# Altium PCB Libaas_system.PcbDoc
Units mm, origin at the board's own origin, x right, y up, seen from the top; angles counter-clockwise.
Board outline 119.25 x 127.51 mm, 2 copper layers (Top Layer, Bottom Layer); 59 components, 50 nets, 249 pads, 16 vias.
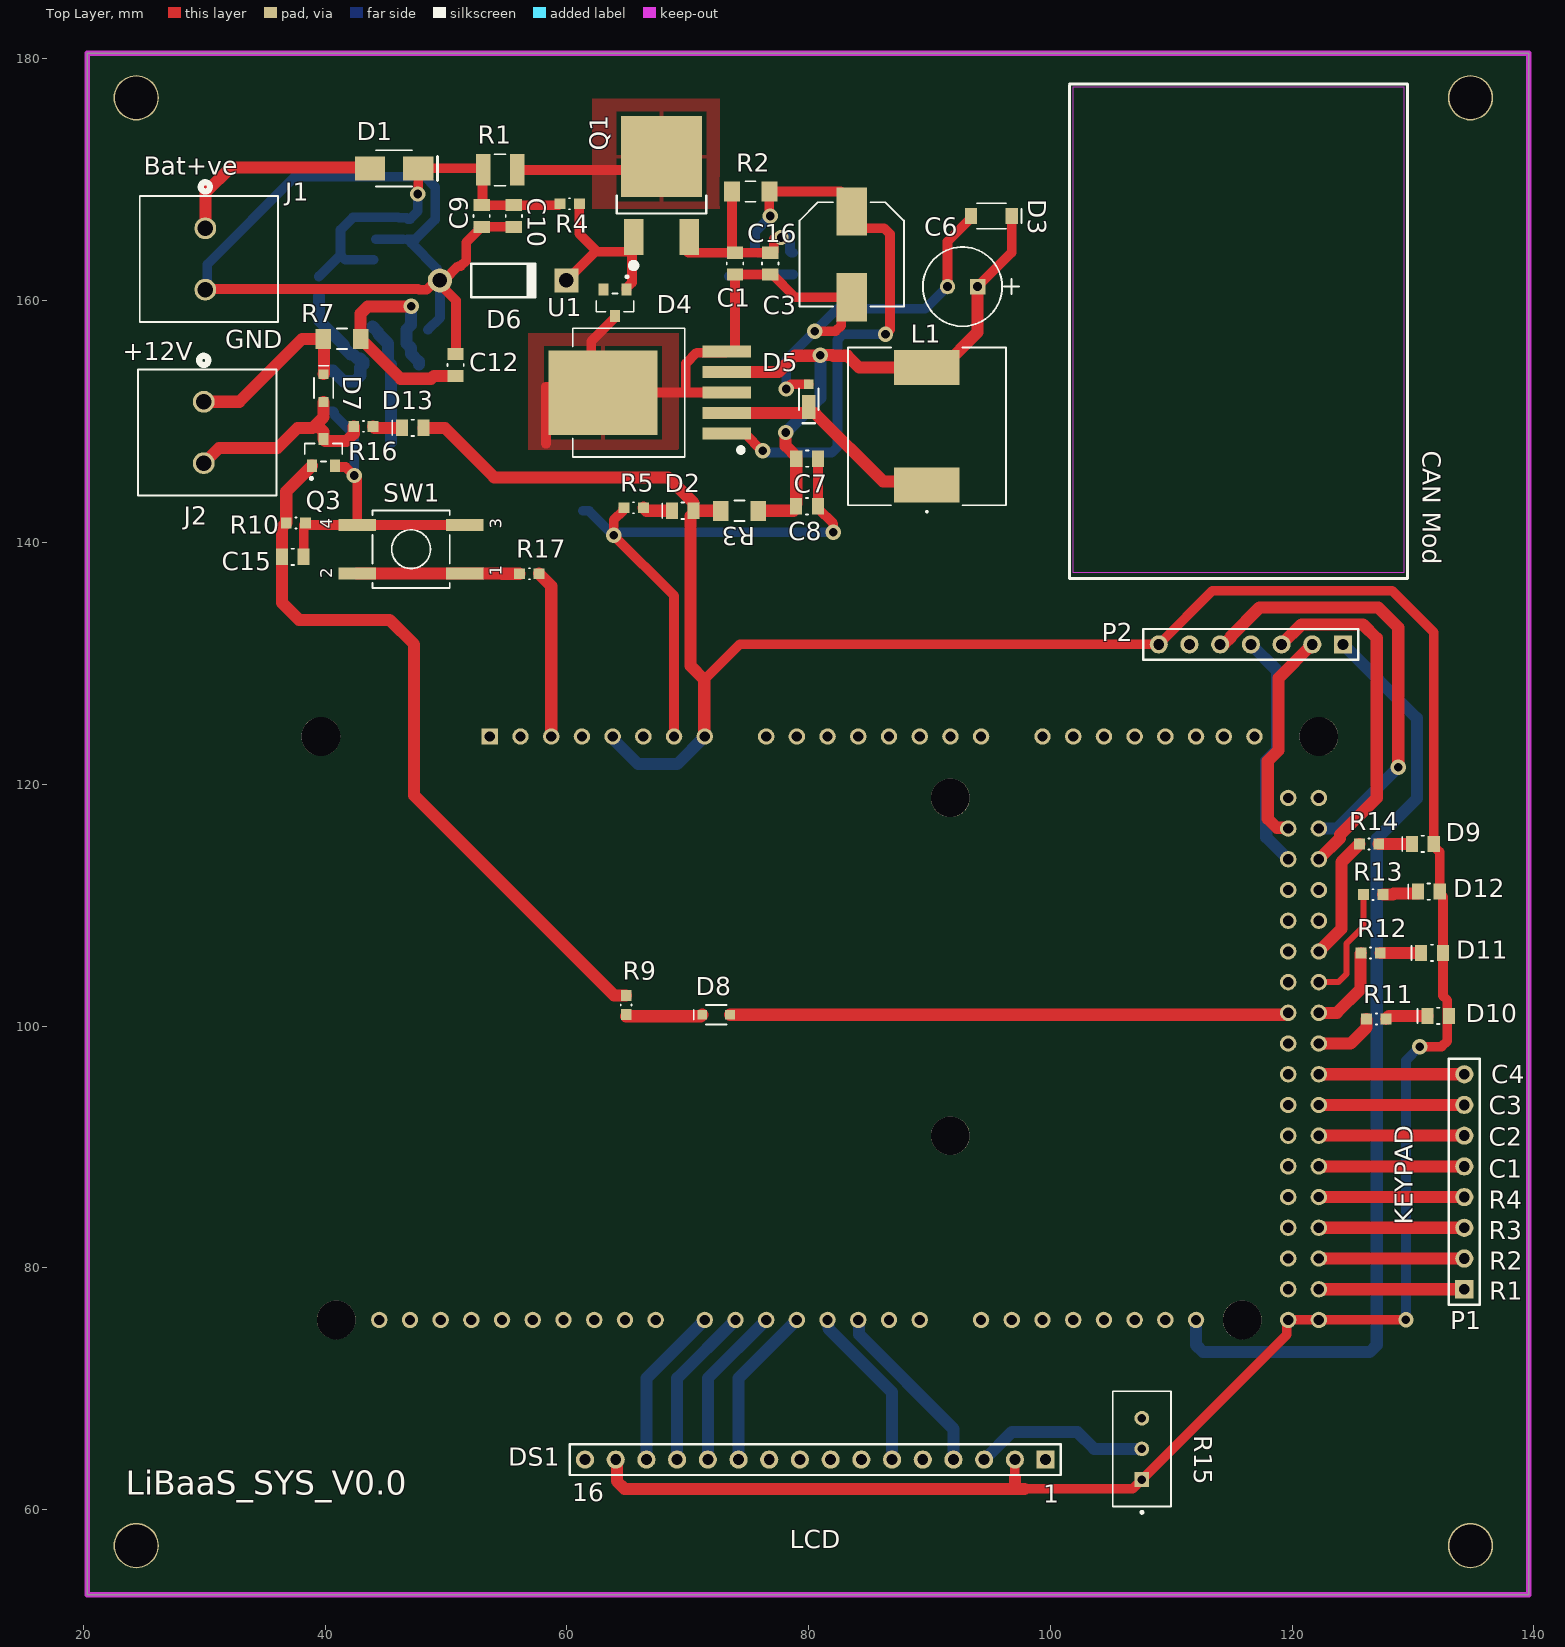
[diagram p0: Top Layer view]
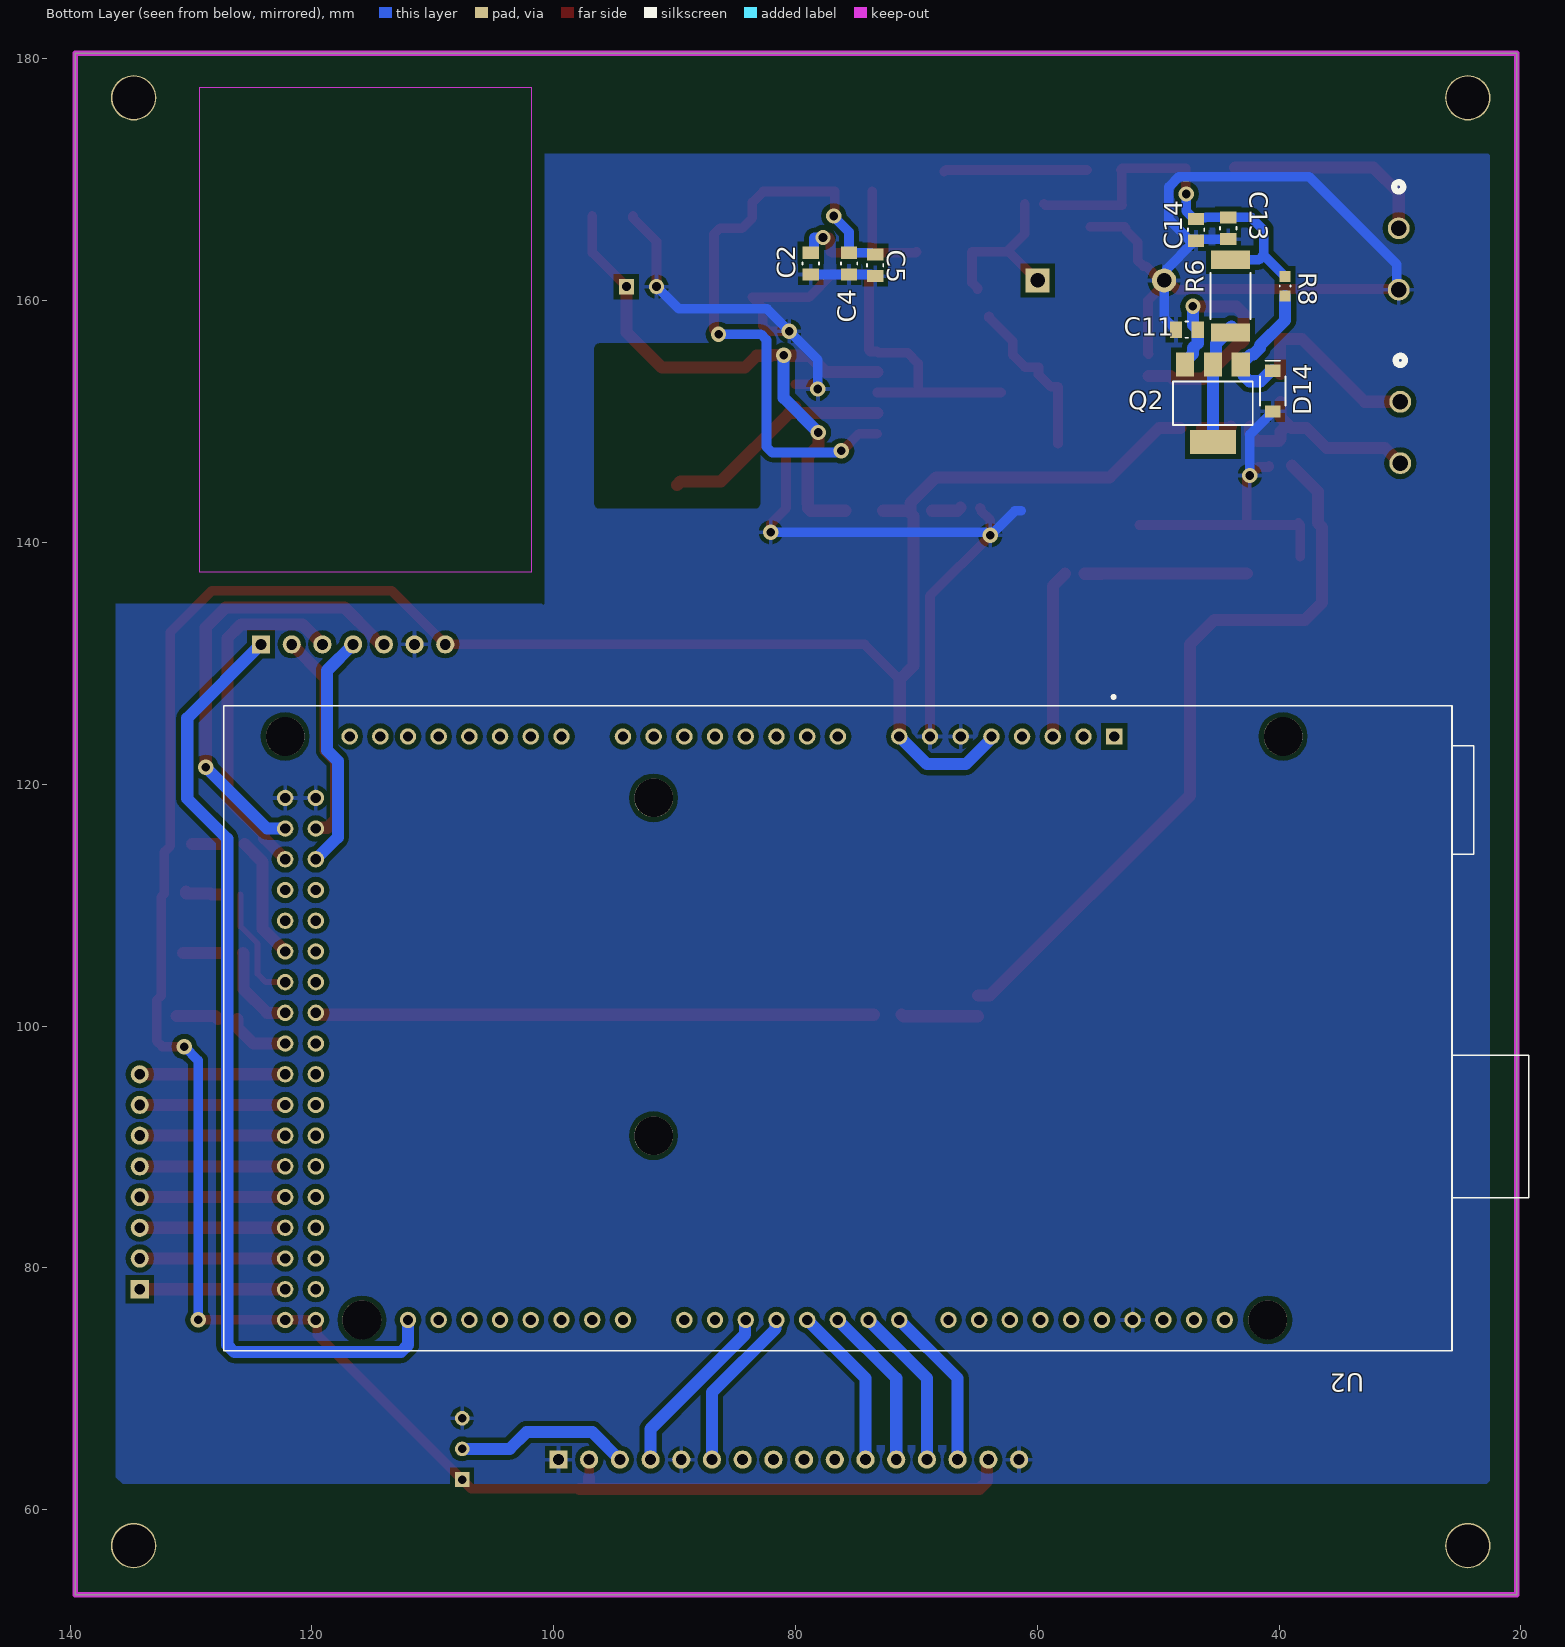
[diagram p1: Bottom Layer view, seen from below]
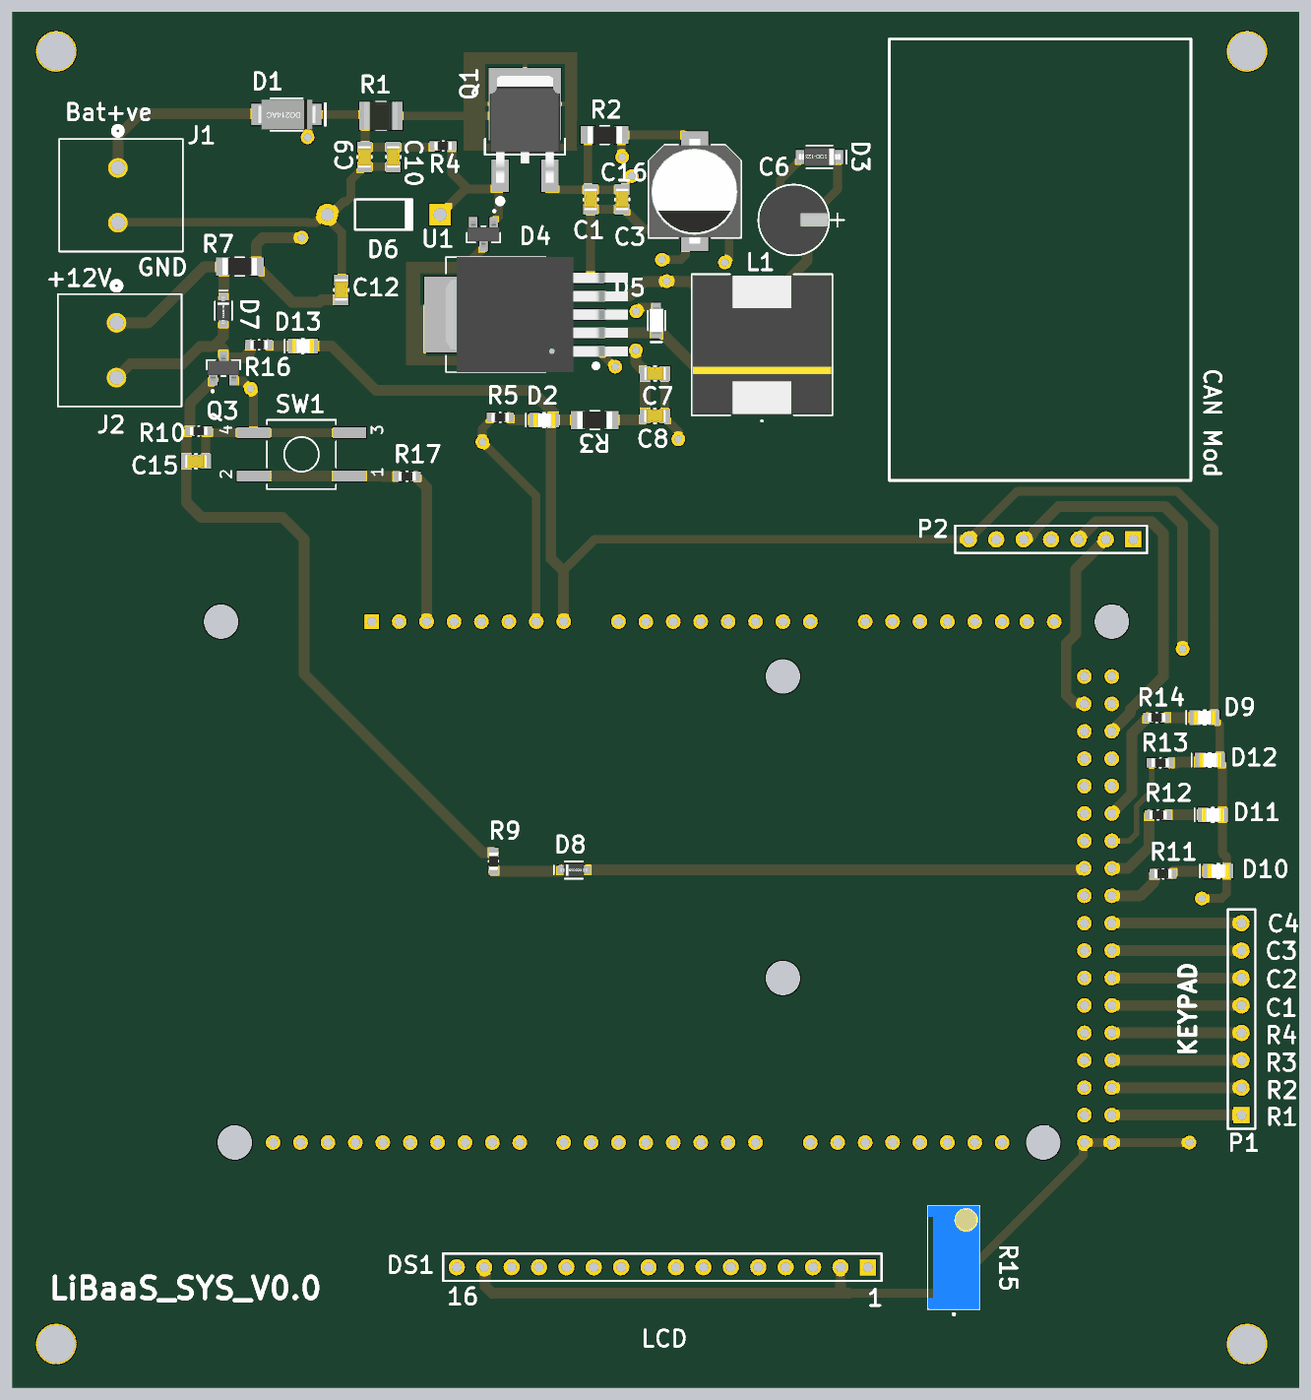
[diagram p2: 3D render of the assembled board from above, using the file's embedded part models]
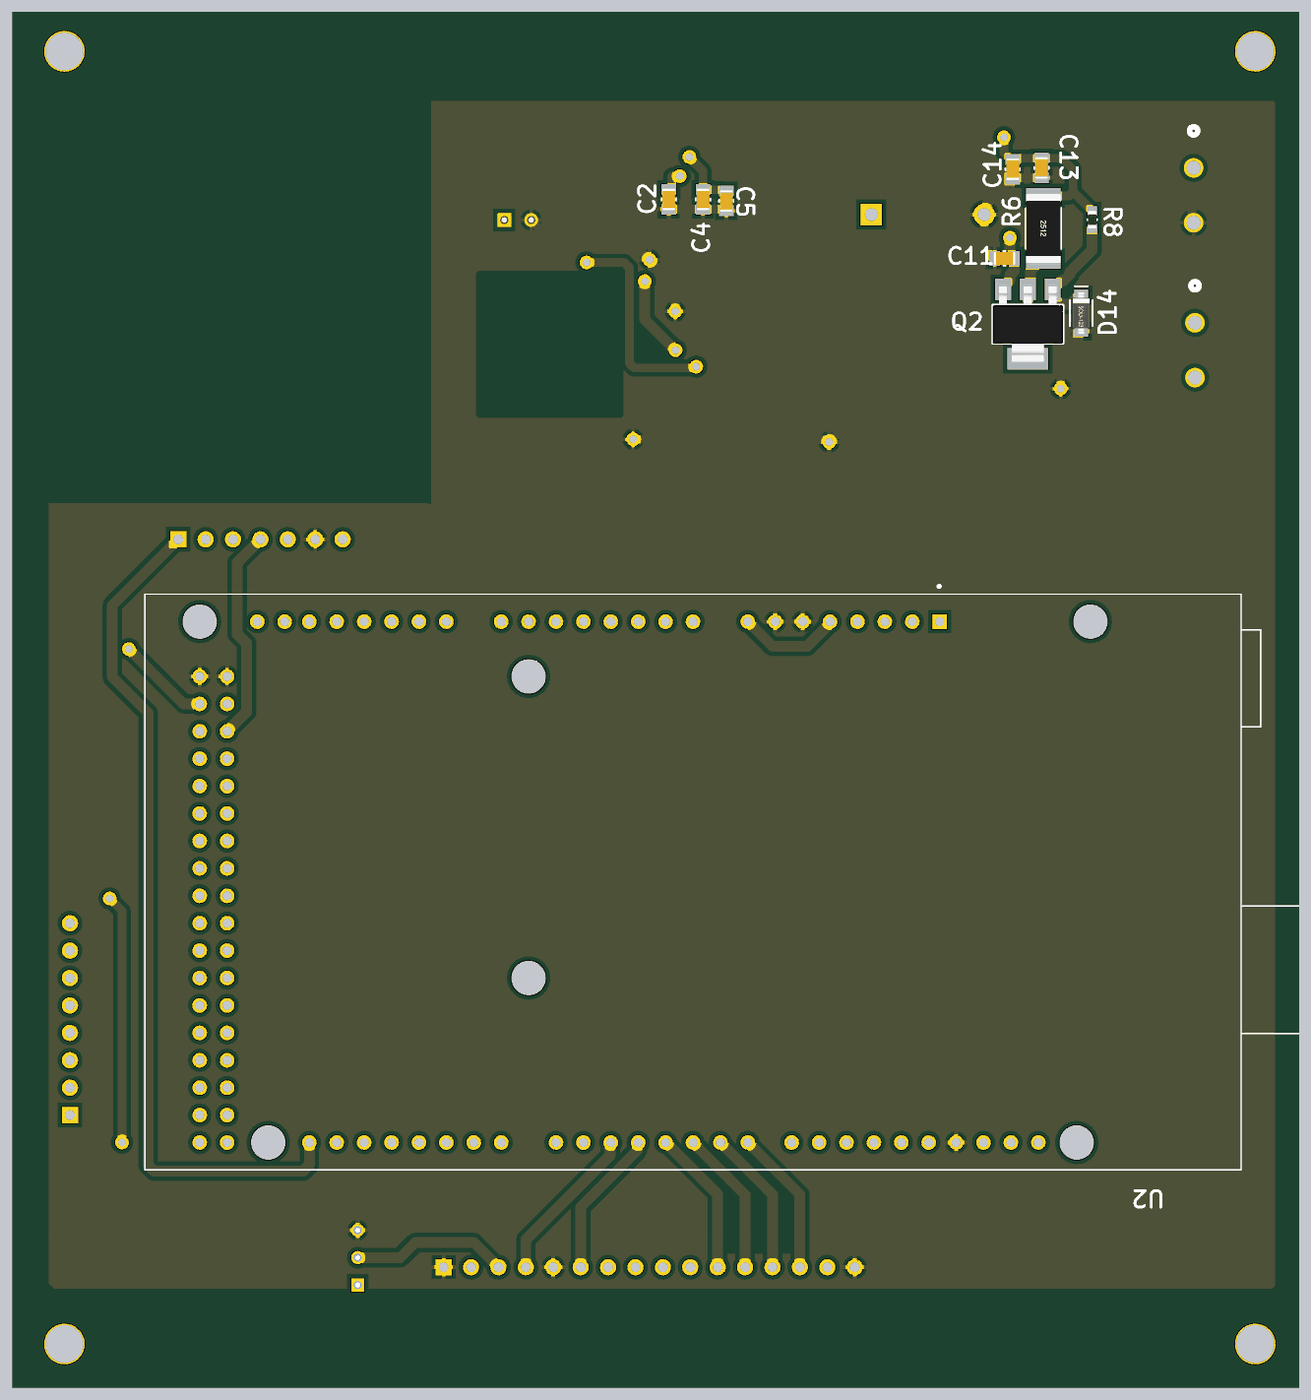
[diagram p3: 3D render of the assembled board from below, using the file's embedded part models]

## Layer stack, top to bottom
Top Solder: solder mask 0.0102, Solder Resist, Dk 3.5
Top Layer: signal copper 0.0356
Dielectric 1: dielectric 0.32, FR-4, Dk 4.8
Bottom Layer: signal copper 0.0356
Bottom Solder: solder mask 0.0102, Solder Resist, Dk 3.5

## Board outline
20.32,52.959 139.573,52.959 139.573,180.467 20.32,180.467

## Design rules (kind name [scope] priority, off if disabled: settings)
Clearance [All] p1: gap=0.4 ignorepadtopadclearanceinfootprint=FALSE
HoleSize [All] p1: absolutevalues=TRUE maxlimit=5 minlimit=0.025 maxpercent=80.000 minpercent=20.000
MinimumSolderMaskSliver [All] p1: minsoldermaskwidth=0.2
PlaneClearance [All] p1: clearance=0.6
PlaneConnect [All] p1: planeconnectstyle=Direct reliefexpansion=0.508 reliefentries=4 reliefconductorwidth=0.254 reliefairgap=0.254
PolygonConnect [All] p1: connectstyle=Relief reliefconductorwidth=0.35 reliefentries=4 polygonreliefangle="90 Angle" airgapwidth=0.35
RoutingVias [All] p1: holewidth=0.711 width=1.27 viastyle="Through Hole" minholewidth=0.711 minwidth=1.27 maxholewidth=0.711 maxwidth=1.27
SilkToSilkClearance [All] p1: silktosilkclearance=0.2
SilkToSolderMaskClearance [IsPad] p1: minsilkscreentomaskgap=0.01 clearancetoexposedcopper=TRUE
SolderMaskExpansion [All] p1: expansion=0.102 istentingtop=FALSE
Width [All] p1: maxlimit=1 minlimit=0.3 preferedwidth=0.5
24 further rules are at their usual default settings.

## Components (designator, comment, footprint, x,y, rotation, side; value= is the part's Value field where it differs from the comment)
C1 "1uF" CAP0805 73.914,163.068 r270 top
C2 "0.1uF" CAP0805 78.74,163.068 r270 bottom
C3 "22uF" CAPAE-D8_H1050 83.566,163.83 r270 top
C4 "0.1uF" CAP0805 75.565,163.068 r270 bottom
C5 "0.1uF" CAP0805 73.406,162.93 r270 bottom
C6 "470uF" UVZ1A471MED 93.98,161.163 r180 top
C7 "0.1uF" CAP0805 79.883,146.939 r0 top
C8 "0.1uF" CAP0805 79.872,143.002 r0 top
C9 "0.1uF" CAP0805 52.959,167.005 r270 top
C10 "1uF" CAP0805 55.626,167.005 r270 top
C11 "1uF" CAP0805 47.625,157.605 r0 bottom
C12 "0.1uF" CAP0805 50.8,154.686 r90 top
C13 "0.1uF" CAP0805 44.196,165.989 r270 bottom
C14 "1uF" CAP0805 46.863,165.862 r270 bottom
C15 "0.1uF" CAP0805 37.338,138.811 r0 top
C16 "1uF" CAP0805 76.835,163.068 r270 top
D1 "DIODE_CA" DO-214AC 45.72,170.942 r180 top
D2 "LED" LED0805 69.596,142.621 r0 top
D3 "MMSZ5236B-7-F" SOD-123 95.123,167.005 r180 top
D4 "ZENER_A_C" SOT-23#1 63.985,159.835 r180 top
D5 "SCHOTTKY_CA" DO-219AD 80.01,152.146 r90 top
D6 "Diode 1N4007" DO-41 54.737,161.671 r0 top
D7 "DIODE_CA" SOD-323 39.878,152.774 r270 top
D8 "DIODE_CA" SOD-323 72.354,100.936 r0 top
D9 "LED" LED0805 130.81,115.062 r0 top
D10 "LED" LED0805 132.08,100.838 r0 top
D11 "LED" LED0805 131.572,106.045 r0 top
D12 "LED" LED0805 131.307,111.125 r0 top
D13 "LED" LED0805 47.255,149.479 r0 top
D14 "MMSZ5245B-7-F" SOD-123 40.513,152.527 r270 bottom
DS1 "LCD_20X4" HDR1X16 99.606,64.135 r180 top
J1 "1711725" 1711725 30.099,165.989 r270 top
J2 "1711725" 1711725 29.972,151.638 r270 top
L1 "IND" SRR1280-102K 89.789,149.606 r90 top value=1000uH
P1 "Header 8" HDR1X8 134.239,78.232 r90 top
P2 "Header 7" HDR1X7 124.206,131.572 r180 top
Q1 "NPN_BCE" TO-252 67.828,168.588 r0 top
Q2 "FZT649TA" SOT-223 45.466,151.511 r0 bottom
Q3 "NMOS_GSD" SOT-23#2 39.878,147.447 r0 top
R1 "10" RES1210 54.483,170.815 r0 top
R2 "0" RES1206 75.21,169.037 r0 top
R3 "0" RES1206 74.295,142.621 r180 top
R4 "4.7k" RES0603 60.236,168.021 r0 top
R5 "182" RES0603 65.532,142.875 r180 top
R6 "10" RES2512 44.02,160.382 r270 bottom
R7 "0" RES1206 41.402,156.845 r180 top
R8 "4.7k" RES0603 39.494,161.2 r270 bottom
R9 "2.2k" RES0603 64.914,101.742 r270 top
R10 "47K" RES0603 37.592,141.605 r180 top
R11 "182" RES0603 126.962,100.584 r180 top
R12 "182" RES0603 126.492,106.045 r180 top
R13 "182" RES0603 126.708,110.871 r180 top
R14 "182" RES0603 126.365,115.062 r180 top
R15 "Trim_pot_3296" Trim_pot_3296 107.569,65.024 r90 top
R16 "182" RES0603 43.18,149.606 r180 top
R17 "182" RES0603 56.896,137.414 r0 top
SW1 "KSC2-SPST-NO" KSC2XXG 47.117,139.446 r180 top
U1 "LM2596-5.0" LM2576-5.0 66.902,152.4 r90 top
U2 "Arduino Mega" "Arduino Mega" 76.492,99.822 r270 bottom

## Footprints (in the part's own frame and the unit in brackets; to place one, negate y for a bottom-side part, rotate by r counter-clockwise, add the part's x,y. Pads: shape width x height; smd on the part's side, far side on the other; paste and mask are expansions set on the pad)
1711725 [mil]
  round 71 hole 51 mask+0: 1(0,0) 2(200,0)
  silkscreen extent -150,-214 305,237, body extent 0,0 10,10, height 10
"Arduino Mega" [mm]
  round 1.358 hole 0.85: 0(24.13,-12.7) 1(24.13,-10.16) 2(24.13,-7.62) 3(24.13,-5.08) 3V3(-24.13,15.24) 4(24.13,-2.54) 5(24.13,0) 5V_1(-24.13,12.7) 5V_2(24.13,-43.18) 5V_3(24.13,-45.72) 6(24.13,2.54) 7(24.13,5.08) 8(24.13,9.144) 9(24.13,11.684) 10(24.13,14.224) 11(24.13,16.764) 12(24.13,19.304) 13(24.13,21.844) 14(24.13,-17.78) 15(24.13,-20.32) 16(24.13,-22.86) 17(24.13,-25.4) 18(24.13,-27.94) 19(24.13,-30.48) 20(24.13,-33.02) 21(24.13,-35.56) 22(21.59,-43.18) 23(21.59,-45.72) 24(19.05,-43.18) 25(19.05,-45.72) 26(16.51,-43.18) 27(16.51,-45.72) 28(13.97,-43.18) 29(13.97,-45.72) 30(11.43,-43.18) 31(11.43,-45.72) 32(8.89,-43.18) 33(8.89,-45.72) 34(6.35,-43.18) 35(6.35,-45.72) 36(3.81,-43.18) 37(3.81,-45.72) 38(1.27,-43.18) 39(1.27,-45.72) 40(-1.27,-43.18) 41(-1.27,-45.72) 42(-3.81,-43.18) 43(-3.81,-45.72) 44(-6.35,-43.18) 45(-6.35,-45.72) 46(-8.89,-43.18) 47(-8.89,-45.72) 48(-11.43,-43.18) 49(-11.43,-45.72) 50(-13.97,-43.18) 51(-13.97,-45.72) 52(-16.51,-43.18) 53(-16.51,-45.72) AD0(-24.13,0) AD1(-24.13,-2.54) AD2(-24.13,-5.08) AD3(-24.13,-7.62) AD4(-24.13,-10.16) AD5(-24.13,-12.7) AD6(-24.13,-15.24) AD7(-24.13,-17.78) AD8(-24.13,-22.86) AD9(-24.13,-25.4) AD10(-24.13,-27.94) AD11(-24.13,-30.48) AD12(-24.13,-33.02) AD13(-24.13,-35.56) AD14(-24.13,-37.846) AD15(-24.13,-40.386) AREF(24.13,26.924) GND1(-24.13,10.16) GND2(-24.13,7.62) GND3(24.13,24.384) GND4(-19.05,-43.18) GND5(-19.05,-45.72) IOREF(-24.13,20.32) RESET(-24.13,17.78) SCL(24.13,32.004) SDA(24.13,29.464) VIN(-24.13,5.08)
  rect 1.358x1.358 hole 0.85: NC(-24.13,22.86)
  round 3.2 hole 3.2 unplated: ""(-24.13,-45.72) ""(-24.13,36.83) ""(-19.05,-15.24) ""(8.89,-15.24) ""(24.13,-39.37) ""(24.13,35.56)
  silkscreen extent -27.52,-50.8 26.67,57.15
CAP0805 [mm]
  rect 1x1.35 smd: 1(-0.9,0) 2(0.9,0)
  silkscreen extent -0.1,-0.67 0.1,0.67, body extent -1,-0.6 1,0.6, height 1.45
CAPAE-D8_H1050 [mm]
  rect 4x2.5 smd: 1(-3.55,0) 2(3.55,0)
  silkscreen extent -4.32,-4.32 4.32,4.32, body extent -4.85,-4.25 4.85,4.25, height 10.5
DO-41 [mm] "Diode, Axial; Body 5.2 x 2.7 mm (LxDia. max), Lead Dia. 0.86 mm (max)"
  round 2 hole 1.2: 1(-5.23,0)
  rect 2x2 hole 1.2: 2(5.23,0)
  silkscreen extent -2.65,-1.4 2.75,1.4
DO-214AC [mm]
  rect 2.5x2 smd: 1(-2,0) 2(2,0)
  silkscreen extent -3.6,-1.5 1.5,1.5, body extent -2.79,-1.4 2.7,1.4, height 2.29
DO-219AD [mm]
  rect 2x1.1 smd: 1(-0.95,0)
  rect 0.8x0.8 smd: 2(0.95,0)
  silkscreen extent -2.3,-0.8 0.6,0.8, body extent -1.55,-0.65 0.95,0.65, height 0.67
HDR1X7 [mm] "Connector; Header; 7 Position"
  rect 1.5x1.5 hole 0.9: 1(0,0)
  round 1.5 hole 0.9: 2(2.54,0) 3(5.08,0) 4(7.62,0) 5(10.16,0) 6(12.7,0) 7(15.24,0)
  silkscreen extent -1.27,-1.27 16.51,1.27
HDR1X8 [mm] "Connector; Header; 8 Position"
  rect 1.5x1.5 hole 0.9: 1(0,0)
  round 1.5 hole 0.9: 2(2.54,0) 3(5.08,0) 4(7.62,0) 5(10.16,0) 6(12.7,0) 7(15.24,0) 8(17.78,0)
  silkscreen extent -1.27,-1.27 19.05,1.27
HDR1X16 [mm] "Connector; Header; 16 Position"
  rect 1.5x1.5 hole 0.9: 1(0,0)
  round 1.5 hole 0.9: 2(2.54,0) 3(5.08,0) 4(7.62,0) 5(10.16,0) 6(12.7,0) 7(15.24,0) 8(17.78,0) 9(20.32,0) 10(22.86,0) 11(25.4,0) 12(27.94,0) 13(30.48,0) 14(33.02,0) 15(35.56,0) 16(38.1,0)
  silkscreen extent -1.27,-1.27 39.37,1.27
KSC2XXG [mm] "SW tactile 6.2mm X 6.2mm 3.5mm Height"
  rect 3.1x1 smd: 1(-4.45,2) 2(4.45,2) 3(-4.45,-2) 4(4.45,-2)
  silkscreen extent -3.2,-3.2 3.2,3.2, body extent -3.1,-3.1 3.1,3.1, height 3.5
LED0805 [mm]
  rect 1x1.35 smd: 1(-0.9,0) 2(0.9,0)
  silkscreen extent -1.7,-0.67 0.1,0.67, body extent -0.99,-0.63 1.01,0.62, height 1.09
LM2576-5.0 [mm]
  rect 1x4 smd: 1(-3.4,-6.33) 2(-1.7,-6.33) 3(0,-6.33) 4(1.7,-6.33) 5(3.4,-6.33)
  rect 7x9 smd: 6(0,3.91)
  silkscreen extent -5.33,-7.7 5.33,6.4, body extent -5.33,-10.45 5.33,6.44, height 4.6
RES0603 [mm]
  rect 0.9x0.9 smd: 1(-0.8,0) 2(0.8,0)
  silkscreen extent -0.05,-0.45 0.05,0.45, body extent -0.8,-0.4 0.8,0.4, height 0.45
RES1206 [mm]
  rect 1.3x1.65 smd: 1(-1.55,0) 2(1.55,0)
  silkscreen extent -0.43,-0.85 0.43,0.85, body extent -1.6,-0.8 1.6,0.8, height 0.6
RES1210 [mm]
  rect 1.2x2.6 smd: 1(-1.4,0) 2(1.4,0)
  silkscreen extent -0.45,-1.3 0.45,1.3, body extent -1.55,-1.3 1.55,1.3, height 0.57
RES2512 [mm]
  rect 1.5x3.2 smd: 1(-3,0) 2(3,0)
  silkscreen extent -1.9,-1.65 1.9,1.65, body extent -3.2,-1.6 3.2,1.6, height 0.59
SOD-123 [mm]
  rect 1x1.3 smd: 1(-1.68,0) 2(1.68,0)
  silkscreen extent -2.5,-1.05 1.2,1.05, body extent -1.94,-0.86 1.91,0.84, height 1.42
SOD-323 [mm] "DIODE ZENER 15V 300MW SOD323"
  rect 0.8x0.8 smd: 1(-1.15,0) 2(1.15,0)
  silkscreen extent -1.85,-0.8 0.85,0.8, body extent -1.25,-0.63 1.25,0.62, height 0.98
SOT-23#1 [mm]
  rect 0.8x1 smd: 1(0,1.1) 2(0.95,-1.1) 3(-0.95,-1.1)
  silkscreen extent -1.55,-2.25 1.55,0.75, body extent -1.46,-1.25 1.46,1.23, height 1
SOT-23#2 [mm]
  rect 0.8x1 smd: 1(-0.95,-1.1) 2(0.95,-1.1) 3(0,1.1)
  silkscreen extent -1.55,-2.25 1.55,0.75, body extent -1.46,-1.25 1.46,1.23, height 1
SOT-223 [mm]
  rect 1.5x2 smd: 1(-2.3,-3.2) 2(0,-3.2) 3(2.3,-3.2)
  rect 3.8x2 smd: 4(0,3.2)
  silkscreen extent -3.3,-1.8 3.3,1.8, body extent -3.25,-3.48 3.25,3.48, height 1.65
SRR1280-102K [mil]
  rect 114x213 smd paste+0 mask+0: 1(-191,0) 2(191,0)
  silkscreen extent -281,-257 257,257, body extent -252,-252 252,252, height 315
TO-252 [mm] "DPAK"
  rect 1.6x3 smd: 1(-2.3,-3.325) 3(2.3,-3.325)
  rect 6.7x6.7 smd: 2(0,3.325)
  silkscreen extent -3.7,-5.9 3.7,0.1, body extent -3.27,-3.99 3.27,5.95, height 2.39
Trim_pot_3296 [mm]
  rect 1.218x1.218 hole 0.71: 1(-2.54,0)
  round 1.218 hole 0.71: 2(0,0) 3(2.54,0)
  silkscreen extent -5.35,-2.41 4.76,2.42, body extent -4.76,-2.42 4.76,2.41, height 11.55
UVZ1A471MED [mil]
  rect 50x50 hole 30 mask+0: 1(0,0)
  round 50 hole 30 mask+0: 2(98,0)
  silkscreen extent -135,-129 178,129, body extent -75,-124 173,124, height 424

## Part data
C1 C10 C11 C14 C16: library part C0805C105K3RACAUTO, "CAP CER 1uF 25V 10% X7R 0805", Manufacturer=Kemet, TempCoef=X7R, Tolerance=10%, Voltage=25V, Alt MFG 1=TDK, Alt MFG 2="Taiyo Yuden", Alt P/N 1=CGA6M2X7R2A105K200AA, Alt P/N 2=HMK325B7105KNHT, Automotive Grade=AEC-Q200, Height=1.45mm, Mounting Type=SMD, Part Number=C0805C105K3RACAUTO, VoltageRating=25V
C2 C7 C8 C9 C12 C13 C15: library part C0805C104J5RACAUTO, "CAP CER 0.1uF 50V 5% X7R 0805", Manufacturer=Kemet, TempCoef=X7R, Tolerance=5%, Voltage=50V, Alt MFG 1=TDK, Alt P/N 1=CGA3E3NP02E821J080AA, Automotive Grade=AEC-Q200, Height=1.45mm, Mounting Type=SMD, Part Number=C0805C104J5RACAUTO, VoltageRating=50V
C3: library part EEE-TG1J220P, "CAP ALUM 22uF 63V 20% SMD", Manufacturer=Panasonic, Tolerance=20%, Voltage=63V, Automotive Grade=AEC-Q200, Height=10.5mm, Mounting Type=SMD, Part Number=EEE-TG1J220P, VoltageRating=63V
C4 C5: library part C0805C104K1RACAUTO, "CAP CER 0.1uF 100V 10% X7R 0805", Manufacturer=Kemet, TempCoef=X7R, Tolerance=10%, Voltage=100V, Alt MFG 1=Murata, Alt P/N 1=GCM1885C1H680FA16D, Automotive Grade=AEC-Q200, Height=1.45mm, Mounting Type=SMD, Part Number=C0805C104K1RACAUTO, VoltageRating=100V
C6: library part UVZ1A471MED, "Aluminium Electrolytic Capacitors - Radial Leaded 470uF 10 Volts 20%", Manufacturer=Nichicon, Tolerance=20%, Voltage=10V, Height=11mm, Mounting Type=TH, Part Number=UVZ1A471MED, VoltageRating=10V
D1: library part S1M, "DIODE GEN 1000V 1A DO214AC", Current at Vf (A)=1A, DC Reverse Voltage  (V, Max)=1000V, Forward Voltage (V)=1V, Manufacturer=Vishay, Power (W)=1W, Automotive Grade=AEC-Q101, Height=1.4W, Mounting Type=SMD, Part Number=S1M, Type=Standard
D2 D9 D10 D11 D12 D13: library part LTST-C171CKT, "LED RED CLEAR 0805", Color=RED, Current=20mA, Manufacturer=Lite-On, Voltage - Forward (Vf)=1.8V, Automotive Grade=N/A, Height=0.8mm, Mounting Type=SMD, Part Number=LTST-C171CKT
D3: "Zener Diodes 7.5V 500mW SOD123", Current at Vf (A)=20mA, DC Reverse Voltage  (V, Max)=7.5V, Forward Voltage (V)=900mV, Manufacturer=Diodes, Power (W)=500mW, Automotive Grade=AEC-Q101, Height=1.35mm, Mounting Type=SMD, Part Number=MMSZ5236B-7-F, Type=Zener
D4: library part BZX84C36-7, "Zener Diode 36V 225mW Â±6% Surface Mount SOT-23-3 (TO-236)", Current at Vf (A)=10mA, DC Reverse Voltage  (V, Max)=36V, Forward Voltage (V)=900mV, Manufacturer=Diodes, Power (W)=500mW, Height=1.35mm, Mounting Type=SMD, Part Number=BZX84C36-7, Type=Zener
D5: library part B140HW-7-F, "1.0A SURFACE MOUNT SCHOTTKY BARRIER RECTIFIER", Current at Vf (A)=1A, DC Reverse Voltage  (V, Max)=40V, Forward Voltage (V)=500mV, Manufacturer=Diodes, Power (W)=350mW, Height=1.35mm, Mounting Type=SMD, Part Number=B140HW-7-F, Type=Schottky
D6: "1 Amp General Purpose Rectifier", Code_JEDEC=DO-204-AL, ComponentLink1Description="Manufacturer Link", ComponentLink1URL=http://www.fairchildsemi.com/, ComponentLink2Description=Datasheet, ComponentLink2URL=http://www.fairchildsemi.com/ds/1N%2F1N4001.pdf, DatasheetVersion=1998, LatestRevisionDate=17-Jul-2002, LatestRevisionNote="Re-released for DXP Platform.", PackageDescription="Diode, Axial; Body 5.2 x 2.7 mm (LxDia. max), Lead Dia. 0.86 mm (max)", PackageReference=DO-41, PackageVersion=Aug-1999, Published=8-Jun-2000, Publisher="Altium Limited"
D7 D8: library part 1N4148WSQ-7-F, "DIODE GEN 75V 150mA SOD-323", Current at Vf (A)=150mA, DC Reverse Voltage  (V, Max)=75V, Forward Voltage (V)=1.25V, Manufacturer=Diodes, Power (W)=200mW, Automotive Grade=AEC-Q101, Height=1.2mm, Mounting Type=SMD, Part Number=1N4148WSQ-7-F, Type=General
D14: "Zener Diodes 15V 500mW SOD123", Current at Vf (A)=10mA, DC Reverse Voltage  (V, Max)=15V, Forward Voltage (V)=500mV, Manufacturer=Diodes, Power (W)=500mW, Height=1.35mm, Mounting Type=SMD, Part Number=MMSZ5245B-7-F, Type=Zener
DS1: "20 x 4 LCD", Manufacturer=local, Package=None, Availability=Unavailable, Component Type=Standard, MF=Gravitech, Mouser-Purchase-URL=https://snapeda.com/shop?store=Mouser&id=833821, MP=LCD-20X4B, Part Number=LCD_20X4, Price=None, SnapEDA_Link=https://www.snapeda.com/parts/LCD-20X4B/Gravitech/view-part/833821/?ref=snap
J1 J2: "PHOENIX CONNECTOR 5.08mm PITCH", Manufacturer=PHOENIX, article_description="MKDS 3/ 2-5,08", Built_By=EMA_Matt, contact_type=Unknown, Copyright="Copyright (C) 2018 Accelerated Designs. All rights reserved", Gender=Female, Manufacturer_Part_Number=1711725, Mounting Type=TH, No# of Positions=3, number_of_connection=2, Number_of_position_per_row=2, number_of_potentials=2, number_of_rows=1, number_of_solder_pins_per_potentials=1, Part Number=1711725, pitch_(mm)=5.08, Plug_system=Unknown, Product_family="MKDS 3", Producttyp="Printed circuit board terminal", RefDes=RefDes, solder_pin_length_(mm)=5, SourceLibrary=Phoenix_Contact_2020-03-19, Type=DEV, Vendor="Phoenix Contact"
L1: library part SRR1280-102K, "Fixed Inductors 1000uH 10% SMD 1280", Current Rating (A)=0.68A, Manufacturer=Bourns, Part Number=SDS125-101M-LF, Tolerance=10%, Height=7.5mm, Mounting Type=SMD
P1: "Header, 8-Pin", LatestRevisionDate=17-Jul-2002, LatestRevisionNote="Re-released for DXP Platform.", Publisher="Altium Limited"
P2: "Header, 7-Pin", LatestRevisionDate=17-Jul-2002, LatestRevisionNote="Re-released for DXP Platform.", Publisher="Altium Limited"
Q1: library part MJD31CT4-A, "BJT NPN 100V 3A TO-252", Continuous Current, Id (A)=3A, Drain-Source Voltage, Vdss (V)=100V, Manufacturer=STMicro, Power, Max (W)=15W, Automotive Grade=Yes, Height=2.4mm, Mounting Type=SMD, Part Number=MJD31CT4-A, Type=NPN
Q2: library part BCP56, "80 V, 1 A NPN medium power transistors", Continuous Current, Id (A)=1A, Drain-Source Voltage, Vdss (V)=80V, Manufacturer=NXP, Power, Max (W)=2W, Automotive Grade=AEC-Q101, Height=1.8mm, Mounting Type=SMD, Part Number=BCP56, Type=NPN
Q3: library part 2N7002KQ-7, "FET N-CH 60V 380mA SOT23", Continuous Current, Id (A)=380mA, Drain-Source Voltage, Vdss (V)=60V, Manufacturer=Diodes, Power, Max (W)=370mW, Approved=Yes, Automotive Grade=AEC-Q101, Height=1.1mm, Mounting Type=SMD, Part Number=2N7002KQ-7, Rds(ON) (Ohm)=2Ohm, Type=N-MOSFET
R1: library part CRCW121010R0FKEA, "RES THK FLM 10Ohm 1% 1/2W 1210", Manufacturer=Vishay, PowerRating=1/2W, Tolerance=1%, Alt MFG 1=STACKPOLE, Alt MFG 2=YAGEO, Alt P/N 1=RMCF0603FT432K, Alt P/N 2=AC0603FR-07432KL, Automotive Grade=AEC-Q200, Height=0.7mm, Mounting Type=SMD, Part Number=CRCW121010R0FKEA
R2 R3 R7: library part CRCW12060000Z0EA, "RES THK FLM 0Ohm 1% 1/4W 1206", Manufacturer=Vishay, PowerRating=1/4W, Tolerance=1%, Alt MFG 1=STACKPOLE, Alt MFG 2=YAGEO, Alt P/N 1=RMCF0603FT16K2, Alt P/N 2=AC0603FR-0716K2L, Automotive Grade=AEC-Q200, Height=0.7mm, Mounting Type=SMD, Part Number=CRCW12060000Z0EA
R4 R8: library part TNPW06034K70BEEA, "RES 4.7K OHM 0.1% 1/8W 0603", Manufacturer=Vishay, PowerRating=1/10W, Tolerance=0.1%, Automotive Grade=AEC-Q200, Height=0.6mm, Mounting Type=SMD, Part Number=TNPW06034K70BEEA
R5 R11 R12 R13 R14 R16 R17: library part CRCW0603182RFKEA, "RES THK FLM 182Ohm 1% 1/10W 0603", Manufacturer=Vishay, PowerRating=1/10W, Tolerance=1%, Alt MFG 2=YAGEO, Alt P/N 2=AC1210FR-071KL, Automotive Grade=AEC-Q200, Height=0.55mm, Mounting Type=SMD, Part Number=CRCW0603182RFKEA
R6: library part WR25X10R0FTL, "RES 10 OHM 1% 1W 2512", Manufacturer=Walsin, PowerRating=1W, Tolerance=1%, Height=0.6mm, Mounting Type=SMD, Part Number=WR25X10R0FTL
R9: library part CRCW06032K20FKEA, "RES THK FLM 2.2kOhm 1% 1/10W 0603", Manufacturer=Vishay, PowerRating=1/10W, Tolerance=1%, Alt MFG 1=STACKPOLE, Alt MFG 2=YAGEO, Alt P/N 1=RMCF0603FG24K0, Alt P/N 2=AC0603FR-0724KL, Automotive Grade=AEC-Q200, Height=0.55mm, Mounting Type=SMD, Part Number=CRCW06032K20FKEA
R10: library part CRCW060347K0FKEA, "RES THK FLM 47kOhm 1% 1/10W 0603", Manufacturer=Vishay, PowerRating=1/10W, Tolerance=1%, Automotive Grade=AEC-Q200, Height=0.55mm, Mounting Type=SMD, Part Number=CRCW060347K0FKEA
R15: "Through Hole Trimmer Potentiometer", Manufacturer=Local, Package="SOT-23-5 Bourns", Availability=Warning, Check_prices=https://www.snapeda.com/parts/3296W-1-100/Bourns/view-part/1463245/?ref=eda, Component Type=Standard, MF=Bourns, MP=3296W-1-100, Part Number=Trim_pot_3296, Price=None, Purchase-URL=https://pricing.snapeda.com/search/part/3296W-1-100/?ref=eda, SnapEDA_Link=https://www.snapeda.com/parts/3296W-1-100/Bourns/view-part/1463245/?ref=snap
SW1: library part KSC243GLFG, "SW TACT SPST-NO 32V 10mA GULLWING", Manufacturer=C&K, Part Number=MJTP1138TR, Approved=Yes, Automotive Grade=Yes, Mounting Type=SMD
U1: library part LM2576-5.0, "Switching Voltage Regulators 3A Step-Down SMPS Regulator", Manufacturer=TI, Package="TO-263-5 Micrel", Availability=Unavailable, Category="BUCK CONV", Height=4.57mm, MF=Microchip, Mounting Type=SMD, MP=LM2576-5.0WU, Part Number=LM2576-5.0, Price=None, SnapEDA_Link=https://www.snapeda.com/parts/LM2576-5.0WU/Microchip/view-part/104848/?ref=snap, Type=Standard
U2: library part "Arduino Mega Rev 3", Manufacturer=Arduino, Package=None, Availability=Unavailable, Category=Controller, Height=7mm, MF=Arduino, Mounting Type=TH, MP="ARDUINO MEGA2560 REV3 - RETAIL", Part Number="Arduino Mega Rev 3", Price=None, SnapEDA_Link=https://www.snapeda.com/parts/ARDUINO%20MEGA2560%20REV3%20-%20RETAIL/Arduino/view-part/1128250/?ref=snap, Type=Standard

## Free pads (board coordinates)
  round 3.75 hole 3.5: 2(24.384,57.023) 2(24.384,176.784) 2(134.747,57.023) 2(134.747,176.784)

## Via types
v1: diameter 1.27, hole 0.711, Top Layer to Bottom Layer, 16 vias

## Nets (pads, with @x,y where several pads share a name; then routed paths per layer and width w, separated by ;. In a path a pad name is that pad's centre, name@x,y a point inside that pad or via, vN(x,y) a via of type N, cw(c..) or ccw(c..) an arc to the next point about the centre after c; other vN are vias at no path point)
+5: D2.2 D9.2 D10.2 D11.2 D12.2 D13.2 DS1.2 DS1.15 P2.7 R3.2 R15.1 U2.5V_1 U2.5V_2 U2.5V_3 U2.VIN | length 257.7
  Top Layer w0.8: 71.374,128.651 74.295,131.572 P2.7 113.411,136.017 128.27,136.017 131.71,132.577 D9.2 131.71,114.887 132.207,114.39 D12.2 132.207,110.95 132.472,110.685 D11.2 132.472,102.503 132.842,102.133 132.842,100.838 132.842,98.767 132.373,98.298 v1(130.556,98.298) ; 97.066,62.664 DS1.2 ; 97.864,61.722 106.807,61.722 R15.1 119.565,74.48 119.565,75.585 U2.5V_2 U2.5V_3 v1(129.413,75.692)
  Top Layer w1: D13.2 49.913,149.479 54.002,145.39 68.375,145.39 70.496,143.269 D2.2 ; DS1.15 64.142,64.039 64.142,62.35 64.77,61.722 97.066,61.722 ; U2.VIN 71.374,123.99 71.374,128.651 70.231,129.794 70.231,142.181 70.496,142.446 D2.2 ; R3.2 D2.2 ; 97.066,62.664 97.066,61.722 ; 97.864,61.722 97.066,61.722
  Bottom Layer w0.8: v1(129.413,75.692) 129.413,97.155 v1(130.556,98.298) v1@130.683,98.298
  Bottom Layer w1: U2.5V_1 63.792,123.855 63.971,123.676 63.971,123.608 65.913,121.666 69.126,121.666 U2.VIN
+12: D7.1 J2.1 R7.2 | length 14.8
  Top Layer w1: J2.1 32.908,151.638 38.115,156.845 R7.2 ; R7.2@39.852,156.67 39.928,156.594 39.928,153.974 D7.1
+36: C3.1 C4.1 C5.1 R2.2 U1.1 | length 51.5
  Top Layer w0.8: U1.1 74.732,149 76.158,147.574 v1(76.2,147.574) ; v1(76.835,167.005) 76.76,167.08 R2.2 82.659,169.037 83.566,168.13 C3.1 83.566,166.839 84.416,165.989 86.272,165.989 86.741,165.52 86.741,157.607 v1(86.36,157.226)
  Bottom Layer w0.8: C5.1 73.581,163.83 73.719,163.968 C4.1 75.565,165.68 76.835,166.95 v1(76.835,167.005) ; v1(76.2,147.574) 76.29,147.484 76.622,147.484 76.659,147.447 81.929,147.447 82.398,147.916 82.398,156.757 82.867,157.226 v1(86.36,157.226)
GND: C1.2 C2.2 C3.2 C4.2 C5.2 C6.2 C7.2 C8.2 C9.2 C10.2 C11.2 C12.2 C13.2 C14.2 C15.2 C16.2 D3.2 D4.1 D5.2 D6.1 D14.2 DS1.1 DS1.5 DS1.16 J1.2 P2.6 Q3.2 R5.2 R10.1 R15.3 SW1.3 SW1.4 U1.3 U1.5 U1.6 U2.GND1 U2.GND2 U2.GND3 U2.GND4 U2.GND5 | length 239.7
  Top Layer w0.8: J1.2 30.151,160.961 47.714,160.961 47.766,160.909 48.42,160.909 49.182,161.671 D6.1 ; C15.2 38.238,141.451 R10.1 38.551,141.446 SW1.4 ; Q3.2 40.828,146.247 41.713,146.247 v1(42.418,145.542) ; v1@42.667,145.293 SW1.4 ; C12.2 50.84,155.626 50.84,160.013 49.507,161.346 D6.1 ; SW1.3 SW1.4 ; C10.2 C9.2 52.784,166.105 52.684,166.005 52.684,165.83 51.689,164.835 51.689,163.322 51.22,162.853 51.014,162.853 49.832,161.671 D6.1 ; 58.28,148.18 58.28,152.892 58.892,152.892 59.89,153.89 59.89,154.502 61.021,154.502 62.019,155.5 62.019,156.631 63.985,158.597 D4.1@63.985,158.72 ; U1.6 69.85,152.4 ; R5.2 64.682,142.825 64.682,142.654 63.881,141.853 v1(63.881,140.589) 68.872,135.598 U2.GND2 ; U1.3 69.85,152.4 ; v1(78.142,152.697) 78.541,153.096 D5.2 ; v1(80.518,157.48) 82.247,157.48 82.716,157.949 82.716,159.43 C3.2 78.898,160.28 77.01,162.168 C16.2 C1.2 73.914,155.9 73.814,155.8 U1.5 73.132,155.7 70.737,155.7 69.85,154.813 69.85,152.4 ; C7.2 80.777,146.933 80.777,143.007 C8.2 80.772,142.827 82.042,141.557 v1(82.042,140.843) ; C6.2 91.491,164.903 93.443,166.855 D3.2
  Bottom Layer w0.8: J1.2 30.259,161.069 30.259,163.011 37.51,170.261 48.272,170.261 49.113,169.42 49.113,166.706 47.496,165.089 47.138,165.089 C14.2@46.815,165.089 ; D14.2 40.663,150.847 40.763,150.747 40.763,150.597 42.418,148.942 v1(42.418,145.542) ; C13.2 C14.2@46.452,165.089 ; C14.2@46.815,165.062 46.938,165.062 47.138,164.862 47.138,164.766 49.277,162.627 49.277,161.901 D6.1 49.507,158.587 C11.2 ; 61.341,142.621 61.849,142.621 v1(63.881,140.589) 64.008,140.589 64.262,140.843 v1(82.042,140.843) ; C5.2 73.581,162.03 73.719,162.168 C4.2 C2.2 ; v1(78.142,152.697) 78.142,155.104 v1(80.518,157.48) 82.359,159.321 89.649,159.321 C6.2
NetC1_1: C1.1 C2.1 C16.1 Q1.3 R2.1 | length 16.2
  Top Layer w0.8: Q1.3@69.991,164.038 70.061,163.968 C1.1@73.76,163.968 ; R2.1 73.66,164.068 C1.1@73.76,163.968 ; v1(77.724,165.227) 77.216,165.227 77.11,165.121 77.11,164.068 77.01,163.968 C16.1 C1.1 C1.1@73.76,163.968
  Bottom Layer w0.8: v1(77.724,165.227) 78.435,165.227 78.465,165.197 78.465,164.068 78.565,163.968 C2.1
NetC6_1: C6.1 C7.1 C8.1 D3.1 L1.2 R3.1 U1.4 | length 51.2
  Top Layer w0.8: C6.1 96.803,163.986 D3.1
  Top Layer w1: U1.4 77.519,154.1 78.867,155.448 v1@80.972,155.448 ; R3.1 78.766,142.621 78.972,142.827 C8.1 78.972,143.177 78.983,143.188 C7.1 78.983,147.114 78.105,147.992 v1(78.105,149.098) ; v1(80.963,155.496) 81.994,155.496 82.042,155.448 83.204,155.448 84.195,154.457 L1.2 91.046,154.457 93.98,157.391 C6.1
  Bottom Layer w1: v1(78.105,149.098) 80.972,151.965 80.972,155.487 v1(80.963,155.496)
NetC9_1: C9.1 C10.1 C13.1 C14.1 D1.1 R1.1 R4.1 R6.1 R8.1 | length 33.1
  Top Layer w0.8: v1(47.678,168.826) 47.72,168.868 D1.1 52.956,170.942 R1.1 53.021,170.753 53.021,167.967 C9.1 C10.1 59.32,167.905 R4.1
  Bottom Layer w0.8: R8.1 39.544,162.05 41.275,163.781 ; R6.1 41.674,163.382 41.275,163.781 ; v1(47.678,168.826) 47.678,167.402 47.038,166.762 C14.1 46.763,166.862 46.098,166.862 46.071,166.889 C13.1 42.302,166.889 41.275,165.862 41.275,163.781
NetC11_1: C11.1 C12.1 Q2.3 R7.1 | length 21.3
  Top Layer w1: R7.1@42.952,156.67 43.102,156.52 43.277,156.52 46.254,153.543 48.768,153.543 49.011,153.786 C12.1 ; R7.1@42.952,157.02 R7.1 42.952,158.94 43.538,159.526 v1(47.12,159.526)
  Bottom Layer w1: v1(47.12,159.526) 47.12,158 C11.1 46.725,156.475 47.116,156.084 47.116,155.611 47.766,154.961 Q2.3
NetC15_1: C15.1 Q3.1 R9.1 R10.2 | length 61.6
  Top Layer w1: Q3.1 36.792,144.211 R10.2 36.438,141.251 C15.1 36.438,135.012 37.846,133.604 45.339,133.604 47.371,131.572 47.371,119.075 63.904,102.542 R9.1
NetD1_2: D1.2 J1.1 | length 17.4
  Top Layer w0.8: D1.2@43.656,171.005 D1.2
  Top Layer w1: J1.1 30.099,168.917 32.187,171.005 D1.2@43.656,171.005
NetD2_1: D2.1 R5.1 | length 2.5
  Top Layer w1: R5.1 66.586,142.621 D2.1
NetD4_3: D4.3 D6.2 Q1.1 R4.2 | length 14.3
  Top Layer w0.8: D6.2 62.334,164.038 62.53,164.038 ; R4.2 61.036,165.532 62.53,164.038 ; D4.3 64.935,161.035 65.391,161.491 65.391,164.038 62.53,164.038
NetD5_1: D5.1 L1.1 U1.2 | length 20
  Top Layer w1: U1.2 79.96,150.7 80.01,150.75 D5.1 80.01,150.746 80.06,150.696 80.51,150.696 86.17,145.036 89.507,145.036 L1.1
NetD7_2: D7.2 J2.2 Q3.3 R16.2 | length 17.7
  Top Layer w1: J2.2@29.772,146.358 31.242,147.828 36.082,147.828 37.712,149.458 38.968,149.458 39.878,150.368 D7.2 ; 39.274,149.764 39.878,149.16 Q3.3 ; Q3.3@40.018,148.407 41.794,148.407 42.38,148.993 R16.2
NetD8_1: D8.1 R9.2 | length 6.3
  Top Layer w1: R9.2@64.914,100.812 71.08,100.812 D8.1
NetD8_2: D8.2 U2.40 | length 46.2
  Top Layer w1: D8.2 119.263,100.936 119.35,101.024 119.604,101.024 U2.40
NetD9_1: D9.1 R14.1 | length 2.7
  Top Layer w1: R14.1 D9.1
NetD10_1: D10.1 R11.1 | length 3.5
  Top Layer w1: R11.1 128.016,100.838 D10.1
NetD11_1: D11.1 R12.1 | length 3.4
  Top Layer w1: R12.1 D11.1
NetD12_1: D12.1 R13.1 | length 3.1
  Top Layer w1: R13.1 128.328,110.871 128.407,110.95 130.407,110.95 D12.1
NetD13_1: D13.1 R16.1 | length 2.4
  Top Layer w1: R16.1 44.107,149.479 D13.1
NetD14_1: D14.1 Q2.1 R8.2 | length 11.4
  Bottom Layer w1: R8.2 39.494,158.383 41.582,156.295 41.582,156.085 42.109,155.558 42.319,155.558 42.666,155.211 42.916,155.211 43.166,154.961 Q2.1 42.916,154.461 42.916,153.804 42.451,153.339 41.531,153.339 40.663,154.207 D14.1
NetDS1_3: DS1.3 R15.2 | length 14.6
  Bottom Layer w1: DS1.3 96.812,66.421 102.235,66.421 103.632,65.024 R15.2
NetDS1_4: DS1.4 U2.2 | length 14.8
  Bottom Layer w1: U2.2 84.18,75.624 84.18,74.478 91.986,66.672 DS1.4
NetDS1_6: DS1.6 U2.3 | length 13.8
  Bottom Layer w1: U2.3 81.64,75.624 81.64,74.972 86.906,69.706 DS1.6
NetDS1_11: DS1.11 U2.4 | length 13.6
  Bottom Layer w1: DS1.11 74.206,70.866 U2.4
NetDS1_12: DS1.12 U2.5 | length 13.6
  Bottom Layer w1: DS1.12 71.666,70.866 U2.5
NetDS1_13: DS1.13 U2.6 | length 13.6
  Bottom Layer w1: DS1.13 69.126,70.866 U2.6
NetDS1_14: DS1.14 U2.7 | length 13.6
  Bottom Layer w1: DS1.14 66.586,70.866 U2.7
NetP1_1: P1.1 U2.23 | length 12
  Top Layer w1: U2.23 P1.1
NetP1_2: P1.2 U2.25 | length 12
  Top Layer w1: U2.25 P1.2
NetP1_3: P1.3 U2.27 | length 12
  Top Layer w1: U2.27 P1.3
NetP1_4: P1.4 U2.29 | length 12
  Top Layer w1: U2.29 P1.4
NetP1_5: P1.5 U2.31 | length 12
  Top Layer w1: U2.31 P1.5
NetP1_6: P1.6 U2.33 | length 12
  Top Layer w1: U2.33 P1.6
NetP1_7: P1.7 U2.35 | length 12
  Top Layer w1: U2.35 P1.7
NetP1_8: P1.8 U2.37 | length 12
  Top Layer w1: U2.37 P1.8
NetP2_1: P2.1 U2.21 | length 79.4
  Bottom Layer w1: U2.21 112.052,73.611 112.638,73.025 126.414,73.025 127,73.611 127,115.495 130.313,118.808 130.313,125.465 P2.1
NetP2_2: P2.2 U2.52 | length 18
  Top Layer w1: U2.52 119.604,116.4 118.733,116.4 117.983,117.15 117.983,121.92 118.872,122.809 118.872,128.778 P2.2
NetP2_3: P2.3 U2.51 | length 29.3
  Top Layer w1: P2.3 120.776,133.222 125.858,133.222 126.997,132.083 126.997,118.869 123.952,115.824 123.952,115.532 U2.51
NetP2_4: P2.4 U2.50 | length 19.8
  Bottom Layer w1: P2.4 118.745,129.413 118.745,122.809 117.856,121.92 117.856,115.608 U2.50
NetP2_5: P2.5 U2.53 | length 37
  Top Layer w1: P2.5 114.35,131.572 114.936,132.158 114.936,132.255 117.303,134.622 127.125,134.622 128.778,132.969 v1(128.778,121.412)
  Bottom Layer w1: U2.53 123.698,116.332 v1(128.778,121.412)
NetQ1_2: Q1.2 R1.2 | length 11.9
  Top Layer w0.8: R1.2 67.564,170.815 Q1.2@67.691,170.688
NetQ2_2: Q2.2 Q2.4 R6.2 | length 10
  Bottom Layer w1: R6.2@43.924,157.864 R6.2@44.364,157.424 ; R6.2@44.426,157.25 45.216,156.46 45.216,154.961 Q2.2 Q2.4
NetR11_2: R11.2 U2.39 | length 5.2
  Top Layer w1: U2.39 124.841,98.552 126.162,99.873 R11.2
NetR12_2: R12.2 U2.41 | length 7.3
  Top Layer w1: U2.41 123.698,101.092 125.652,103.046 125.652,106.005 R12.2
NetR13_2: R13.2 U2.43 | length 9.7
  Top Layer w0.5: U2.43 123.825,103.632 124.502,104.309 124.502,106.836 125.908,108.242 R13.2
NetR14_2: R14.2 U2.45 | length 10.3
  Top Layer w1: U2.45 124.079,108.039 124.079,113.576 R14.2
NetR17_1: R17.1 SW1.1 SW1.2 | length 13.4
  Top Layer w1: SW1.2 SW1.1 54.617,137.446 54.649,137.414 R17.1
NetR17_2: R17.2 U2.RESET | length 13.9
  Top Layer w1: R17.2 58.712,136.398 U2.RESET
pads on no net: D4.2 DS1.7 DS1.8 DS1.9 DS1.10 U2. U2.0 U2.1 U2.3V3 U2.8 U2.9 U2.10 U2.11 U2.12 U2.13 U2.14 U2.15 U2.16 U2.17 U2.18 U2.19 U2.20 U2.22 U2.24 U2.26 U2.28 U2.30 U2.32 U2.34 U2.36 U2.38 U2.42 U2.44 U2.46 U2.47 U2.48 U2.49 U2.AD0 U2.AD1 U2.AD2 U2.AD3 U2.AD4 U2.AD5 U2.AD6 U2.AD7 U2.AD8 U2.AD9 U2.AD10 U2.AD11 U2.AD12 U2.AD13 U2.AD14 U2.AD15 U2.AREF U2.IOREF U2.NC U2.SCL U2.SDA

## Polygon pours and split planes (outlines as drawn)
NetQ1_2 on Top Layer "L02_P-001" (solid, remove dead copper, pour order 6): 62.124,176.7 62.124,167.586 72.664,167.586 72.664,176.7
GND on Top Layer "L02_P-001" (solid, remove dead copper, pour order 4): 56.792,157.294 56.792,147.684 69.192,147.684 69.254,147.746 69.254,157.294
GND on Bottom Layer "L02_P-001" (solid, remove dead copper, pour order 5): 22.568,172.05 22.692,172.174 100.75,172.174 100.75,134.912 100.874,134.788 100.998,134.912 136.214,134.912 136.214,62.682 135.656,62.124 22.816,62.124 22.568,62.372

## Keep-outs
Keep-Out Layer:
  rectangle: 101.854,137.541 129.286,177.673
  lines w0.454: 20.32,52.959 20.32,180.467 139.573,180.467 139.573,52.959 20.32,52.959

## Silkscreen, mask and mechanical layers (free items; w line width, h text height)
Top Overlay:
  lines w0.254: 101.6,177.8 101.6,137.033 128.524,137.033 129.54,137.033 129.54,177.927 101.6,177.927
  text "Bat+ve" at 25.019,170.434 h1.52
  text "GND" at 31.75,156.06 h1.52
  text "+12V" at 23.256,155.068 h1.52
  text "CAN Mod" at 130.81,147.574 h1.52 r270
  text "C4" at 136.451,95.25 h1.52
  text "C3" at 136.262,92.719 h1.52
  text "C2" at 136.282,90.092 h1.52
  text "C1" at 136.262,87.449 h1.52
  text "R4" at 136.262,84.907 h1.52
  text "KEYPAD" at 129.974,83.554 h1.52 r90
  text "R3" at 136.262,82.365 h1.52
  text "R2" at 136.324,79.823 h1.52
  text "R1" at 136.324,77.343 h1.52
  text "LiBaaS_SYS_V0.0" at 23.526,61.245 h2
  text "16" at 60.452,60.706 h1.52
  text "1" at 99.392,60.58 h1.52
  text "LCD" at 78.436,56.798 h1.52

## Text inside footprints (layer, text, board x,y; h text height)
SW1: Top Overlay "4" at 40.617,141.146 h1 r90; Top Overlay "3" at 54.617,141.146 h1 r90; Top Overlay "2" at 40.617,137.046 h1 r90; Top Overlay "1" at 54.617,137.246 h1 r90